# EAGLE board RackSide (EAGLE 7.7.0)
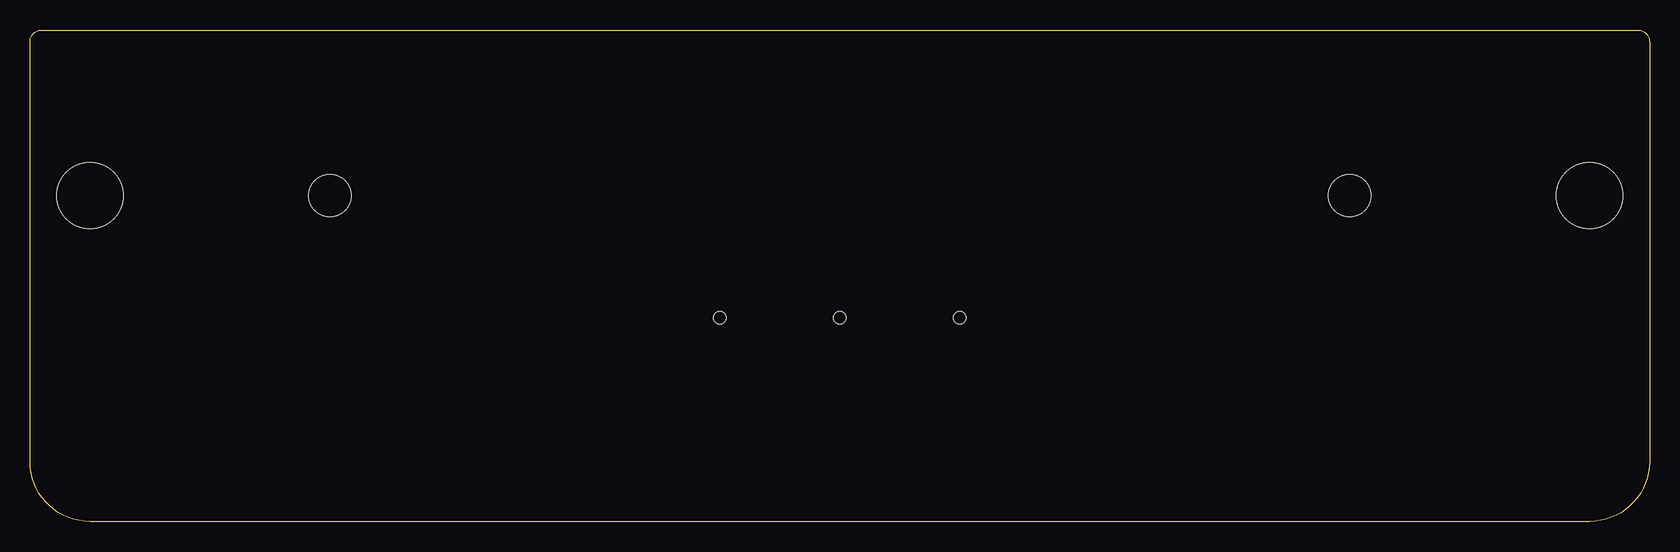
[diagram p0: board, top side]
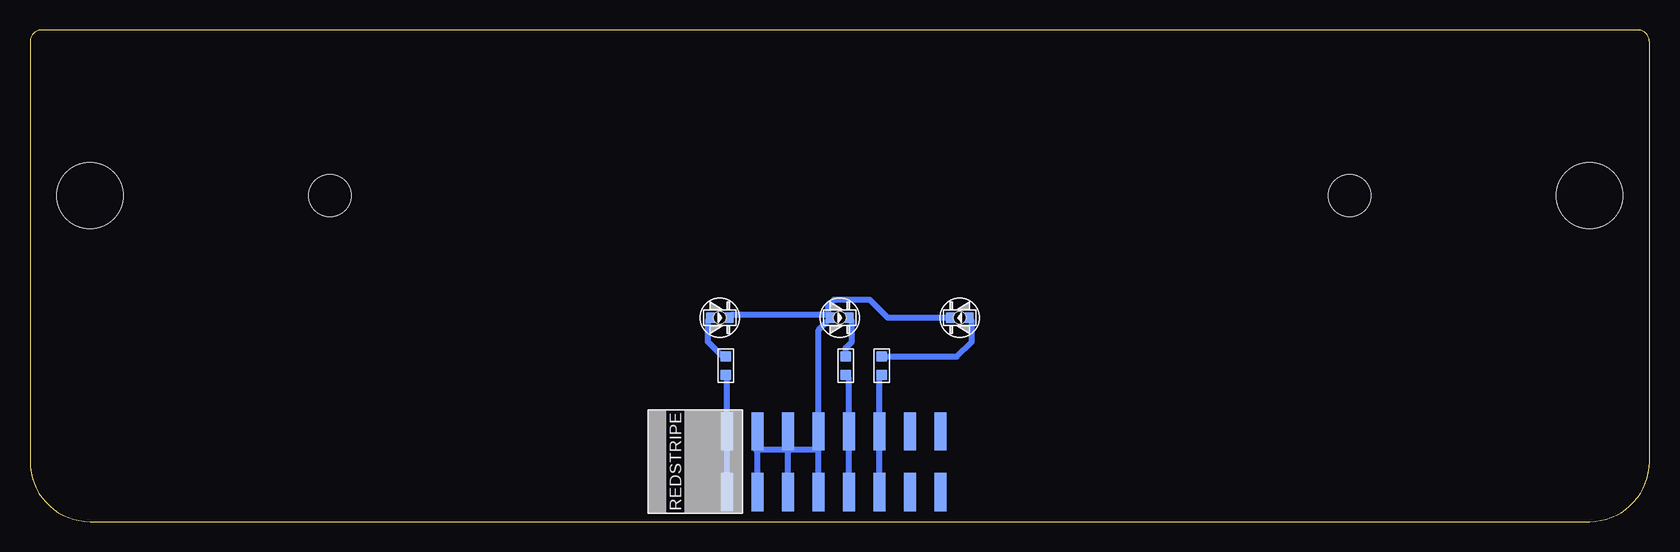
[diagram p1: board, bottom side, seen from below]

Size 135 x 41 mm. Coordinates in mm from the lower left corner, seen from the top.
Outline: 1,41 134,41 arc-90 135,40 135,5 arc-90 130,0 5,0 arc-90 0,5 0,40 arc-90 1,41
Copper layers (1*16): Top 0.035mm / dielectric 1.5mm / Bottom 0.035mm
Design rules "default": minimum track width 10mil, minimum drill 24mil, track to track 8mil, track to pad 8mil, pad to pad 8mil, via to via 8mil, smd to smd 8mil, copper to edge 40mil, drill to drill 8mil, minimum pad ring 10mil, minimum via ring 8mil, stop-mask expansion 4mil, vias tented up to drill 0mil, thermal gap 10mil
Net classes: 0 default: width 0.5 mm
Holes 5.5 mm at 5,27.2 130,27.2
Holes 3.5 mm at 25,27.2 110,27.2
Holes 1 mm at 57.5,17 67.5,17 77.5,17

## Footprints (pad centres in the part's own frame; a part is rotated, then mirrored left to right if it is on the bottom)
LED0603 = smd 0.762 x 0.889: + -0.762,0; - 0.762,0
R0603 = smd 0.889 x 0.889: 1 -0.762,0; 2 0.762,0
2X08_SMT_HEADER = smd 1 x 3.17: 1 -8.89,-2.54; 2 -8.89,2.54; 3 -6.35,-2.54; 4 -6.35,2.54; 5 -3.81,-2.54; 6 -3.81,2.54; 7 -1.27,-2.54; 8 -1.27,2.54; 9 1.27,-2.54; 10 1.27,2.54; 11 3.81,-2.54; 12 3.81,2.54; 13 6.35,-2.54; 14 6.35,2.54; 15 8.89,-2.54; 16 8.89,2.54

## Placement (x,y rotation side)
D1  [LED0603]  67.5,17 0 bottom
D2  [LED0603]  77.5,17 0 bottom
D3  [LED0603]  57.5,17 180 bottom
R1  [R0603]  67,13 90 bottom
R2  [R0603]  77,13 90 bottom
R3  [R0603]  64,13 90 bottom
U$1  POWERSMT  [2X08_SMT_HEADER]  68,5 0 bottom

## Library data of the parts
D1-D3 U$1 = EurorackModularParts
R1-R3 = OPL

## Nets
GND: D1.+ D2.- D3.- U$1.3 U$1.4 U$1.5 U$1.6 U$1.7 U$1.8
N$1: R1.1 U$1.9 U$1.10
N$2: R2.1 U$1.1 U$1.2
N$3: R3.1 U$1.11 U$1.12
N$4: D1.- R1.2
N$5: D2.+ R2.2
N$6: D3.+ R3.2

## Tracks (layer width: path | path; a pad name or v marks a point on that pad's centre or on a via)
GND
  Bottom 0.5: 72,6 69.5,6 69.27,6.23 | 72,6 74.5,6 74.35,6.15 | 69.27,6.23 U$1.8 69.27,15.99 D1.+ 68.5,17.24 | U$1.7 69.27,6.23 | U$1.5 71.81,5.81 72,6 | U$1.6 71.81,6.19 72,6 | D3.- 63.5,17 65,18.5 68,18.5 68.5,18 68.5,17.24 | 68.5,17.24 76.5,17.24 D2.- | U$1.4 74.35,6.15 | U$1.3 74.35,6.15
N$1
  Bottom 0.5: R1.1 66.73,11.97 U$1.10 U$1.9
N$2
  Bottom 0.5: R2.1 76.89,12.13 U$1.2 U$1.1
N$3
  Bottom 0.5: R3.1 64.19,12.05 U$1.12 U$1.11
N$4
  Bottom 0.5: R1.2 67,14.5 66.5,15 66.5,16.76 D1.-
N$5
  Bottom 0.5: R2.2 77.26,13.76 78.5,15 78.5,16.76 D2.+
N$6
  Bottom 0.5: R3.2 57.74,13.76 56.5,15 56.5,16.76 D3.+